# EAGLE board Start Simulating (EAGLE 7.6.0)

Size 73.58 x 101.49 mm. Coordinates in mm from the lower left corner, seen from the top.
Outline: 0,0 56.82,0 56.82,53.33 0,53.33 0,0
Copper layers (1*16): Top 0.035mm / dielectric 1.5mm / Bottom 0.035mm
Design rules "default": minimum track width 10mil, minimum drill 24mil, track to track 8mil, track to pad 8mil, pad to pad 8mil, via to via 8mil, smd to smd 8mil, copper to edge 40mil, drill to drill 8mil, minimum pad ring 10mil, minimum via ring 8mil, stop-mask expansion 4mil, vias tented up to drill 0mil, thermal gap 10mil

## Footprints (pad centres in the part's own frame; a part is rotated, then mirrored left to right if it is on the bottom)
LED5MM = drill 0.813 octagon: A -1.27,0; K 1.27,0
1X8P-2.54-2.54-11.6-3.0-BLACK-MALE = drill 0.889 pad 1.651 square: 1 0,8.89 | drill 0.889 pad 1.651: 2 0,6.35; 3 0,3.81; 4 0,1.27; 5 0,-1.27; 6 0,-3.81; 7 0,-6.35; 8 0,-8.89
PIEZO-12MM = drill 1 pad 2.54: P$1 -3.25,0; P$2 3.25,0
1X3P-2.54-2.54-11.6-3.0-BLACK-MALE = drill 0.889 pad 1.651 square: 1 0,2.54 | drill 0.889 pad 1.651: 2 0,0; 3 0,-2.54
0207/10 = drill 0.813 octagon: 1 -5.08,0; 2 5.08,0
B25V = drill 0.813 long: A 2.54,0.635; E -2.54,0.635; S 0,0.635
TL1105 = drill 1 pad 1.676: 1 -2.25,3.25; 2 2.25,3.25; 3 -2.25,-3.25; 4 2.25,-3.25
ARDUINO_UNO = drill 1.016 pad 1.88: 0 63.5,50.8; 1 60.96,50.8; 2 58.42,50.8; 3 55.88,50.8; 3.3V 35.56,2.54; 4 53.34,50.8; 5 50.8,50.8; 5V 38.1,2.54; 6 48.26,50.8; 7 45.72,50.8; 8 41.656,50.8; 9 39.116,50.8; 10 36.576,50.8; 11 34.036,50.8; 12 31.496,50.8; 13 28.956,50.8; A0 50.8,2.54; A1 53.34,2.54; A2 55.88,2.54; A3 58.42,2.54; A4 60.96,2.54; A5 63.5,2.54; AREF 23.876,50.8; GND 26.416,50.8; GND. 43.18,2.54; GND.. 40.64,2.54; I/OREF 30.48,2.54; N/C 27.94,2.54; RESET 33.02,2.54; SCL 18.796,50.8; SDA 21.336,50.8; VIN 45.72,2.54 | hole 3.2: 66.04,7.62; 66.04,35.56; 15.24,50.8; 13.97,2.54
1X16P-2.54-2.54-11.6-3.0-BLACK-MALE = drill 0.889 pad 1.651 square: 1 0,19.05 | drill 0.889 pad 1.651: 2 0,16.51; 3 0,13.97; 4 0,11.43; 5 0,8.89; 6 0,6.35; 7 0,3.81; 8 0,1.27; 9 0,-1.27; 10 0,-3.81; 11 0,-6.35; 12 0,-8.89; 13 0,-11.43; 14 0,-13.97; 15 0,-16.51; 16 0,-19.05

## Placement (x,y rotation side)
D2  [LED5MM]  5,60.88 0 top
D3  [LED5MM]  5,73.58 0 top
KEYPAD1  [1X8P-2.54-2.54-11.6-3.0-BLACK-MALE]  5,22.78 0 top
PIEZO3  [PIEZO-12MM]  5,175.18 0 top  (outside the outline)
PING1  [1X3P-2.54-2.54-11.6-3.0-BLACK-MALE]  5,187.88 0 top  (outside the outline)
R2  10k‎Ω  [0207/10]  5,162.48 0 top  (outside the outline)
R3  100‎Ω  [0207/10]  5,86.28 0 top
R4  100‎Ω  [0207/10]  5,98.98 0 top
R5  220‎Ω  [0207/10]  5,124.38 0 top  (outside the outline)
Rpot3  250k‎Ω  [B25V]  5,137.08 0 top  (outside the outline)
S1  [TL1105]  5,149.78 0 top  (outside the outline)
SERVO1  [1X3P-2.54-2.54-11.6-3.0-BLACK-MALE]  5,35.48 0 top
U1  [ARDUINO_UNO]  5,10.08 0 top
U2  [ARDUINO_UNO]  5,48.18 0 top
U3  [1X16P-2.54-2.54-11.6-3.0-BLACK-MALE]  5,111.68 0 top

## Library data of the parts
D2 D3 KEYPAD1 PIEZO3 PING1 R2-R5 Rpot3 S1 SERVO1 U1-U3 = AUTODESK_CIRCUITS_BREADBOARD

## Nets
N$1: PING1.2 R5.1 Rpot3.A S1.4 SERVO1.2 U2.5V U3.2
N$2: KEYPAD1.8 U1.2
N$3: KEYPAD1.7 U1.3
N$4: KEYPAD1.6 U1.4
N$5: KEYPAD1.5 U1.5
N$6: KEYPAD1.4 U1.6
N$7: KEYPAD1.3 U1.7
N$8: KEYPAD1.2 U1.8
N$9: KEYPAD1.1 U1.9
N$10: D2.K D3.K PING1.1 R2.1 Rpot3.E SERVO1.1 U2.GND. U3.1 U3.5 U3.16
N$11: SERVO1.3 U2.9
N$12: U1.GND.. U2.GND..
N$13: U1.A4 U2.A4
N$14: U1.A5 U2.A5
N$15: D2.A R4.1
N$16: D3.A R3.1
N$17: R3.2 U2.12
N$18: U2.11 U3.4
N$19: U2.10 U3.6
N$20: U2.5 U3.11
N$21: U2.4 U3.12
N$22: U2.3 U3.13
N$23: U2.2 U3.14
N$24: R5.2 U3.15
N$25: Rpot3.S U3.3
N$26: R4.2 U2.13
N$27: R2.2 S1.3
N$28: PIEZO3.P$2 U1.10
N$29: PIEZO3.P$1 U1.GND
N$33: U2.8
N$34: PING1.3 U2.7
N$35: S1.1 U2.6

## Tracks (layer width: path | path; a pad name or v marks a point on that pad's centre or on a via)
N$1  (6 unrouted)
N$2  (1 unrouted)
N$3  (1 unrouted)
N$4  (1 unrouted)
N$5  (1 unrouted)
N$6  (1 unrouted)
N$7  (1 unrouted)
N$8  (1 unrouted)
N$9  (1 unrouted)
N$10  (9 unrouted)
N$11  (1 unrouted)
N$12  (1 unrouted)
N$13  (1 unrouted)
N$14  (1 unrouted)
N$15  (1 unrouted)
N$16  (1 unrouted)
N$17  (1 unrouted)
N$18  (1 unrouted)
N$19  (1 unrouted)
N$20  (1 unrouted)
N$21  (1 unrouted)
N$22  (1 unrouted)
N$23  (1 unrouted)
N$24  (1 unrouted)
N$25  (1 unrouted)
N$26  (1 unrouted)
N$27  (1 unrouted)
N$28  (1 unrouted)
N$29  (1 unrouted)
N$34  (1 unrouted)
N$35  (1 unrouted)